# EAGLE board circuit2 (EAGLE 9.4.2)
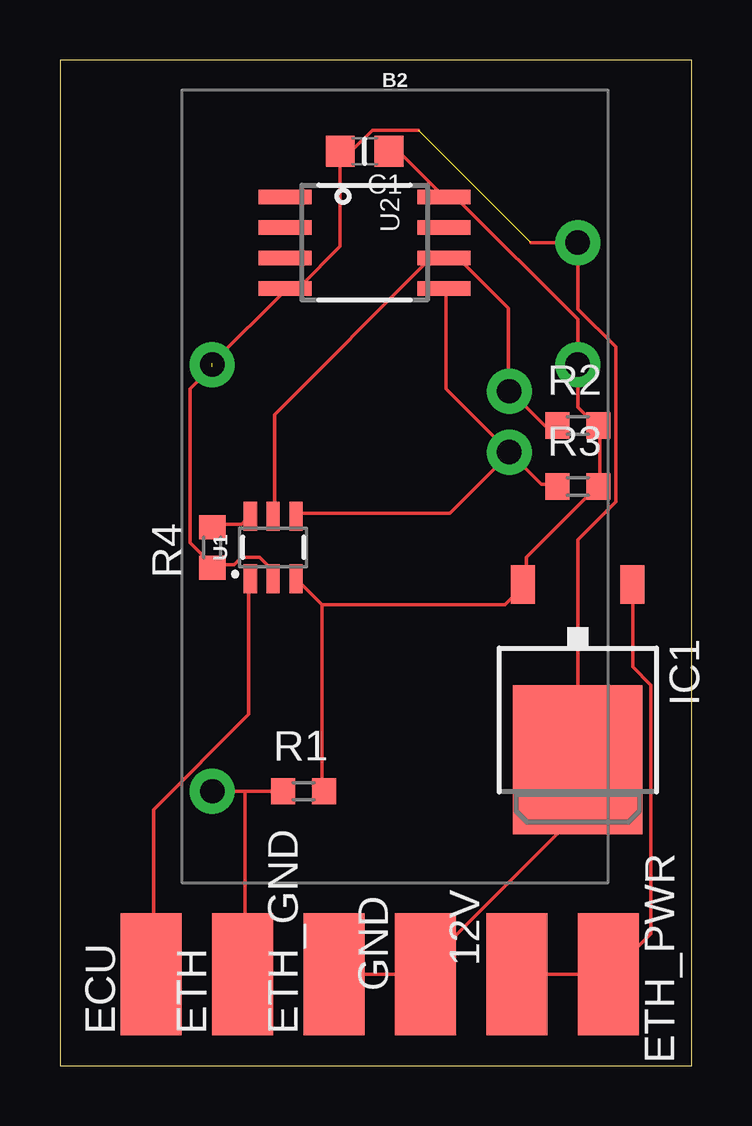
[diagram p0: board, top side]

Size 26.34 x 41.9 mm. Coordinates in mm from the lower left corner, seen from the top.
Outline: 0,0 26.34,0 26.34,41.9 0,41.9 0,0
Copper layers (1*16): Top 0.035mm / dielectric 1.5mm / Bottom 0.035mm
Design rules "default": minimum track width 6mil, minimum drill 0.35mm, track to track 6mil, track to pad 6mil, pad to pad 6mil, via to via 6mil, smd to smd 6mil, copper to edge 40mil, drill to drill 6mil, minimum pad ring 10mil, minimum via ring 8mil, stop-mask expansion 4mil, vias tented up to drill 0mil, thermal gap 10mil

## Footprints (pad centres in the part's own frame; a part is rotated, then mirrored left to right if it is on the bottom)
SMD2,54-5,08 = smd 2.54 x 5.08: 1 0,0
ARDUINO_PRO_MINI = drill 1.016 pad 1.88: 4 -7.62,5.08; 11 -7.62,-12.7; 21 7.62,5.08; 23 7.62,10.16; A4 4.763,1.429; A5 4.763,3.969
_0805MP = smd 1.2 x 1.3: 1 -1.016,0; 2 1.016,0
TO252 = smd 1 x 1.6: 1 -2.28,-4.8; 2 2.28,-4.8 | smd 5.4 x 6.2: 3 0,2.5
R0603 = smd 1 x 1.1: 1 -0.85,0; 2 0.85,0
SOT23-6 = smd 0.55 x 1.2: 1 0.95,1.3; 2 0,1.3; 3 -0.95,1.3; 4 -0.95,-1.3; 5 0,-1.3; 6 0.95,-1.3
SOIC8_208MIL = smd 0.6 x 2.2: 1 -1.905,-3.315; 2 -0.635,-3.315; 3 0.635,-3.315; 4 1.905,-3.315; 5 1.905,3.315; 6 0.635,3.315; 7 -0.635,3.315; 8 -1.905,3.315

## Placement (x,y rotation side)
12V  WIREPADSMD2,54-5,08  [SMD2,54-5,08]  19.05,3.81 180 top
B2  ARDUINO_PRO_MINI_DEPIN  [ARDUINO_PRO_MINI]  13.97,24.13 0 top
C1  10uF  [_0805MP]  12.7,38.1 180 top
ECU  WIREPADSMD2,54-5,08  [SMD2,54-5,08]  3.81,3.81 0 top
ETH  WIREPADSMD2,54-5,08  [SMD2,54-5,08]  7.62,3.81 0 top
ETH_GND  WIREPADSMD2,54-5,08  [SMD2,54-5,08]  11.43,3.81 0 top
ETH_PWR  WIREPADSMD2,54-5,08  [SMD2,54-5,08]  22.86,3.81 180 top
GND  WIREPADSMD2,54-5,08  [SMD2,54-5,08]  15.24,3.81 180 top
IC1  7805DT  [TO252]  21.59,15.24 180 top
R1  4.7k  [R0603]  10.16,11.43 0 top
R2  4.7k  [R0603]  21.59,26.67 0 top
R3  4.7k  [R0603]  21.59,24.13 0 top
R4  10k  [R0603]  6.35,21.59 90 top
U1  MCP4725  [SOT23-6]  8.89,21.59 180 top
U2  MB85RC256VPF-G-JNERE2  [SOIC8_208MIL]  12.7,34.29 270 top

## Library data of the parts
12V ECU ETH ETH_GND ETH_PWR GND = wirepad
B2 = SparkFun-Boards-revised
C1 U2 = microbuilder
IC1 R1-R4 = adafruit
U1 = SparkFun-IC-Conversion; PROD_ID: IC-08886

## Nets
ETH: B2.11 ETH.1 R1.1
GND: B2.4 B2.23 C1.2 ETH_GND.1 GND.1 IC1.3 R4.1 U1.2 U2.4
N$4: R4.2 U1.6
OUT: ECU.1 U1.1
SCL: B2.A5 R2.1 U1.5 U2.6
SDA: B2.A4 R3.1 U1.4 U2.5
VCC: B2.21 C1.1 IC1.2 R1.2 R2.2 R3.2 U1.3 U2.8
VIN: 12V.1 ETH_PWR.1 IC1.1

## Tracks (layer width: path | path; a pad name or v marks a point on that pad's centre or on a via)
ETH
  Top 0.152: B2.11 7.72,11.43 | 7.72,11.43 R1.1 | 7.72,11.43 7.72,3.81 ETH.1
GND  (3 unrouted)
  Top 0.152: 6.35,20.88 7.26,20.88 7.57,21.18 8.33,21.18 8.79,20.73 8.79,20.42 U1.2 8.94,20.27 8.94,19.96 | 6.35,20.88 5.44,21.79 5.44,28.19 6.35,29.11 | 6.35,20.88 R4.1 | 6.35,29.26 9.4,32.31 U2.4 9.4,32.46 10.01,32.46 11.68,34.14 C1.2 12.14,38.1 13.02,38.98 14.95,38.98 | 11.38,3.81 ETH_GND.1 GND.1 15.34,3.81 15.34,4.27 21.59,10.52 IC1.3 21.59,21.91 23.17,23.48 23.17,29.94 21.59,31.52 B2.23 19.64,34.29
N$4
  Top 0.152: R4.2 6.35,22.55 7.57,22.55 7.87,22.86 U1.6
OUT
  Top 0.152: U1.1 7.87,20.27 7.87,14.63 3.91,10.67 3.91,3.81 ECU.1
SCL
  Top 0.152: R2.1 20.22,26.67 18.85,28.04 B2.A5 18.69,28.19 18.69,31.55 16.71,33.53 16.1,33.53 U2.6 15.95,33.53 15.34,33.53 8.94,27.13 8.94,23.01 U1.5
SDA
  Top 0.152: R3.1 20.68,24.23 20.07,24.23 18.85,25.45 B2.A4 | U1.4 9.85,23.01 16.26,23.01 18.69,25.45 B2.A4 | U2.5 16.1,32.31 16.1,28.19 18.69,25.6 B2.A4
VCC
  Top 0.152: C1.1 14.12,38.1 15.95,36.27 U2.8 16.1,36.12 16.56,36.12 21.59,31.09 B2.21 21.59,27.43 22.35,26.67 R2.2 22.5,26.67 22.5,24.23 R3.2 22.35,24.08 19.46,21.18 19.46,20.12 IC1.2 19.3,19.96 18.54,19.2 10.92,19.2 | 10.92,19.2 10.92,11.43 R1.2 | 10.92,19.2 9.85,20.27 U1.3
VIN
  Top 0.152: IC1.1 23.88,19.96 23.88,16.61 24.64,15.85 24.64,5.49 22.96,3.81 ETH_PWR.1 12V.1